# Altium PCB RCCLTV2.PcbDoc
Units mil, origin at the board's own origin, x right, y up, seen from the top; angles counter-clockwise.
Board outline 1102.36 x 1771.65 mil, 4 copper layers (Top Layer, Layer 1, Layer 2, Bottom Layer), stack 23.756 mil thick; 57 components, 45 nets, 244 pads, 4 vias.
Unrouted connection lines stored in the file: 74.
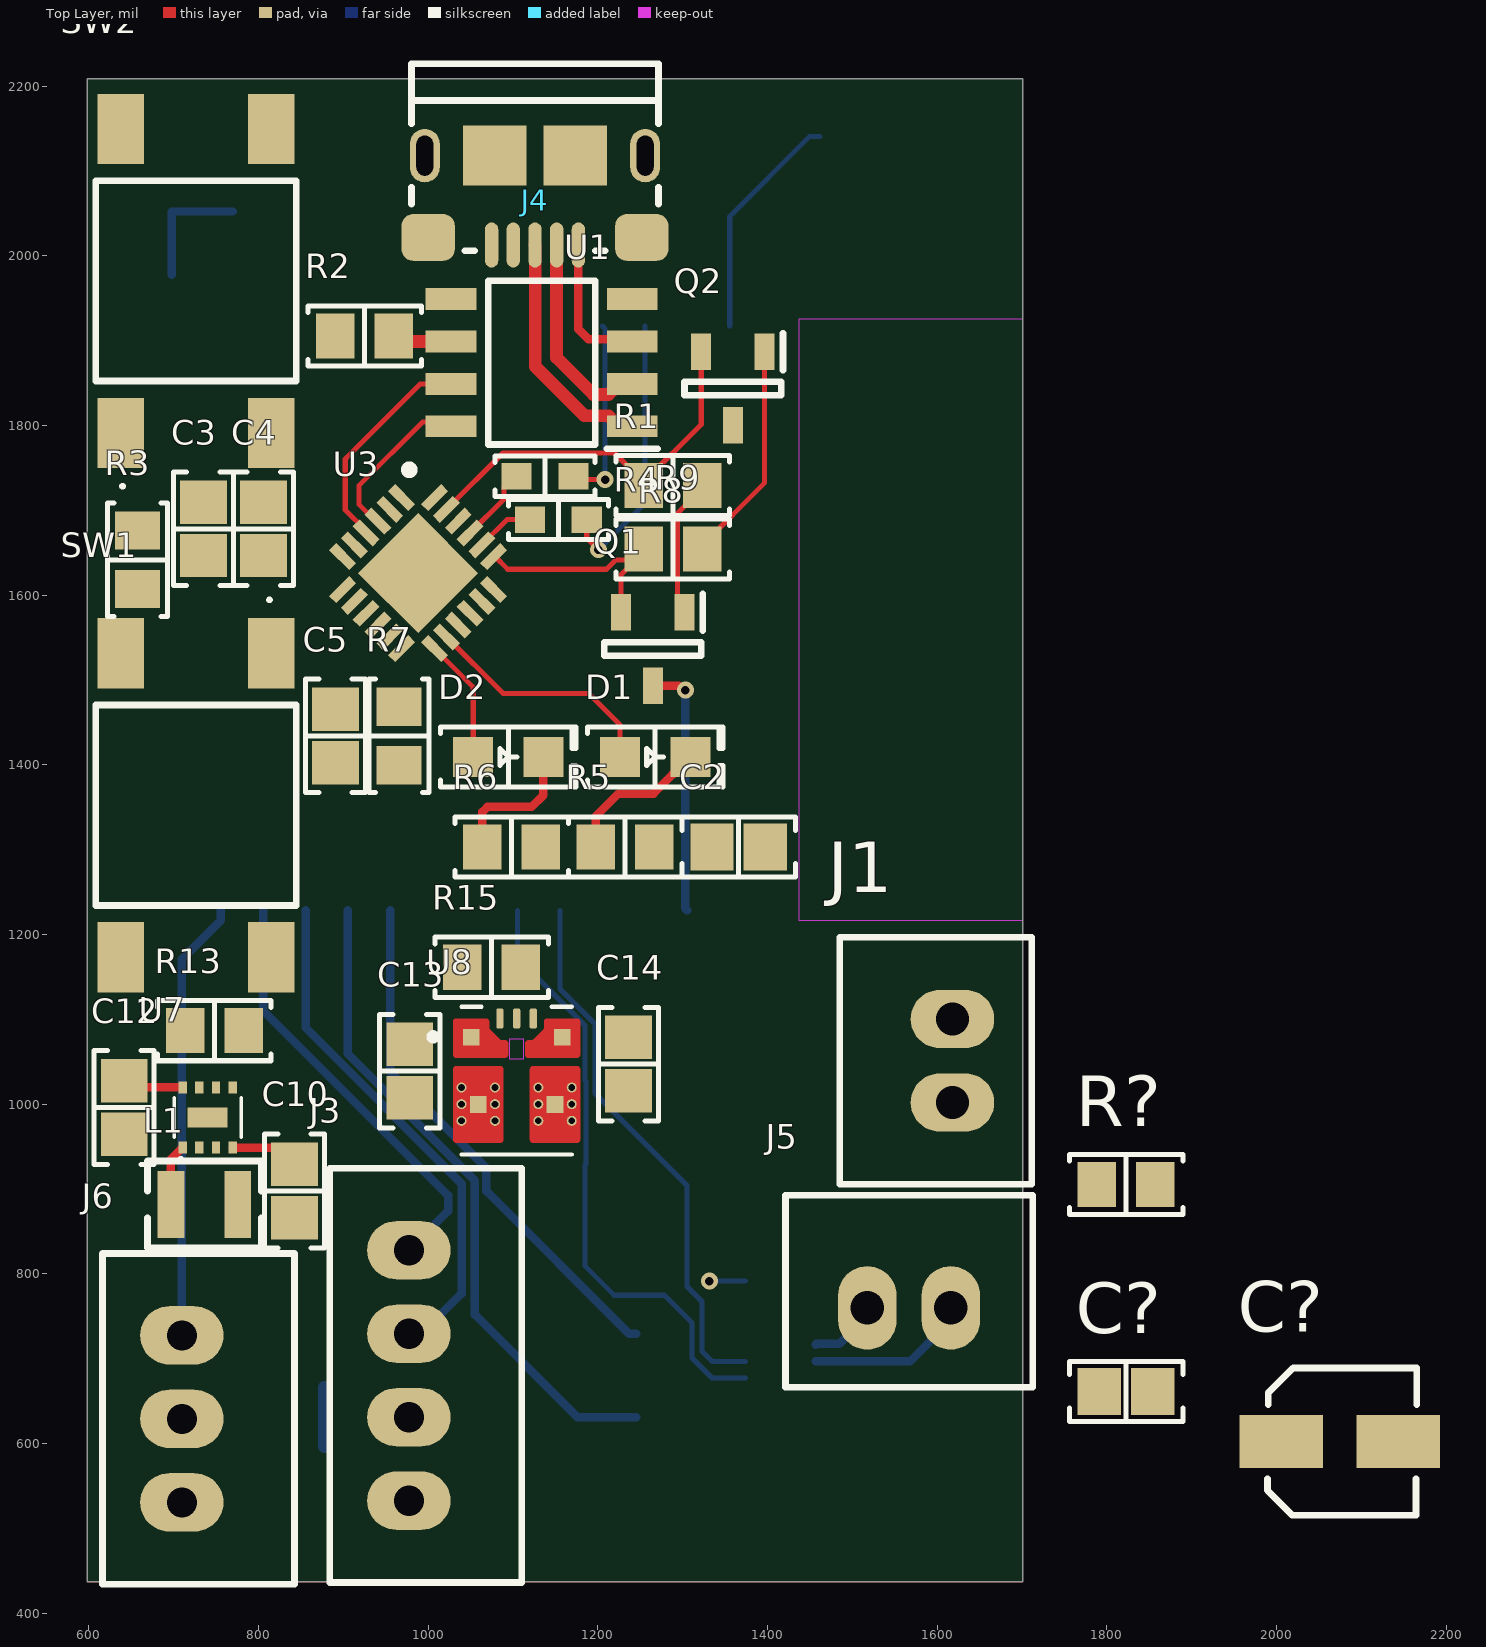
[diagram p0: Top Layer view]
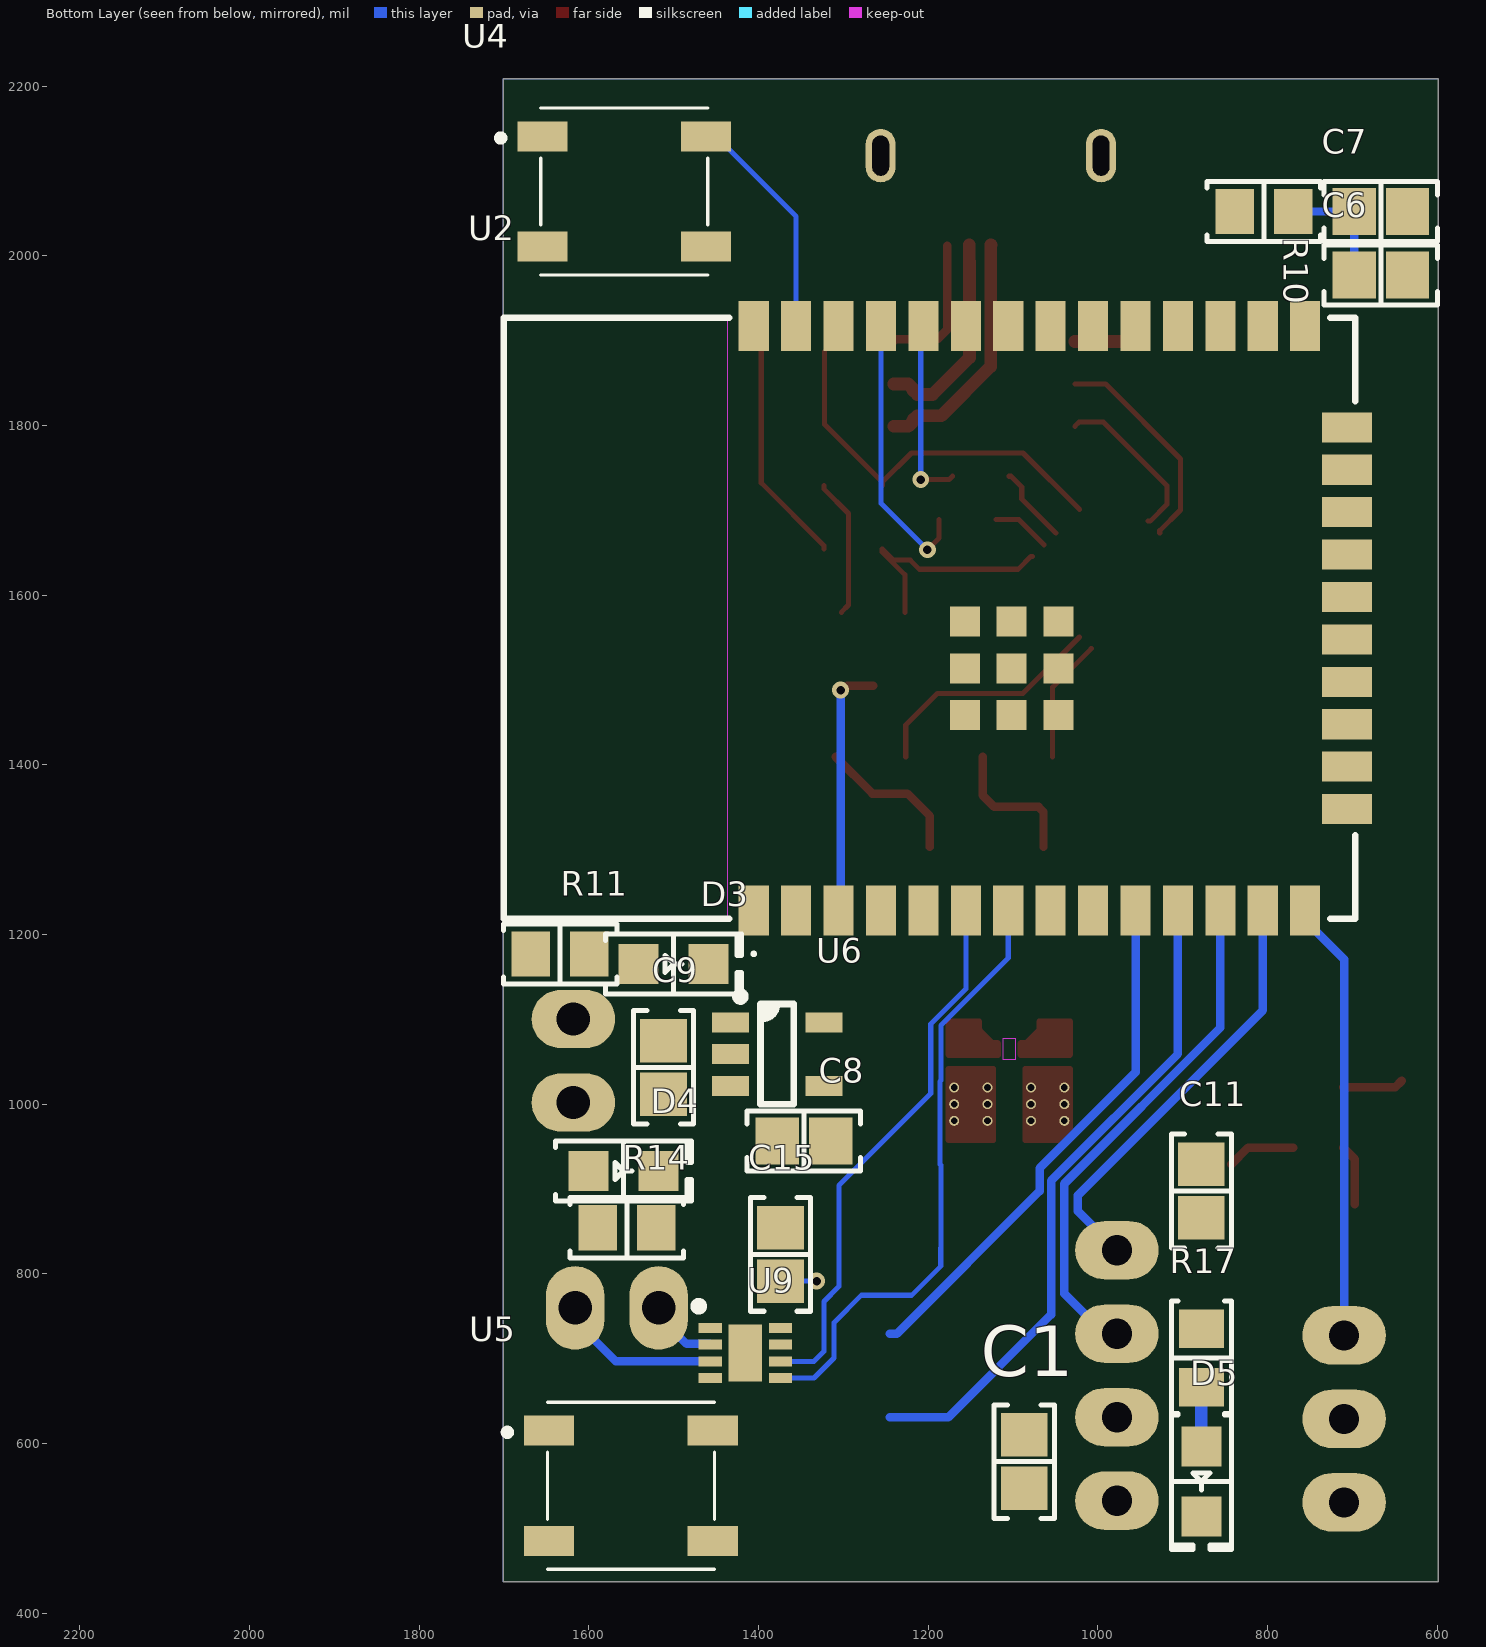
[diagram p1: Bottom Layer view, seen from below]
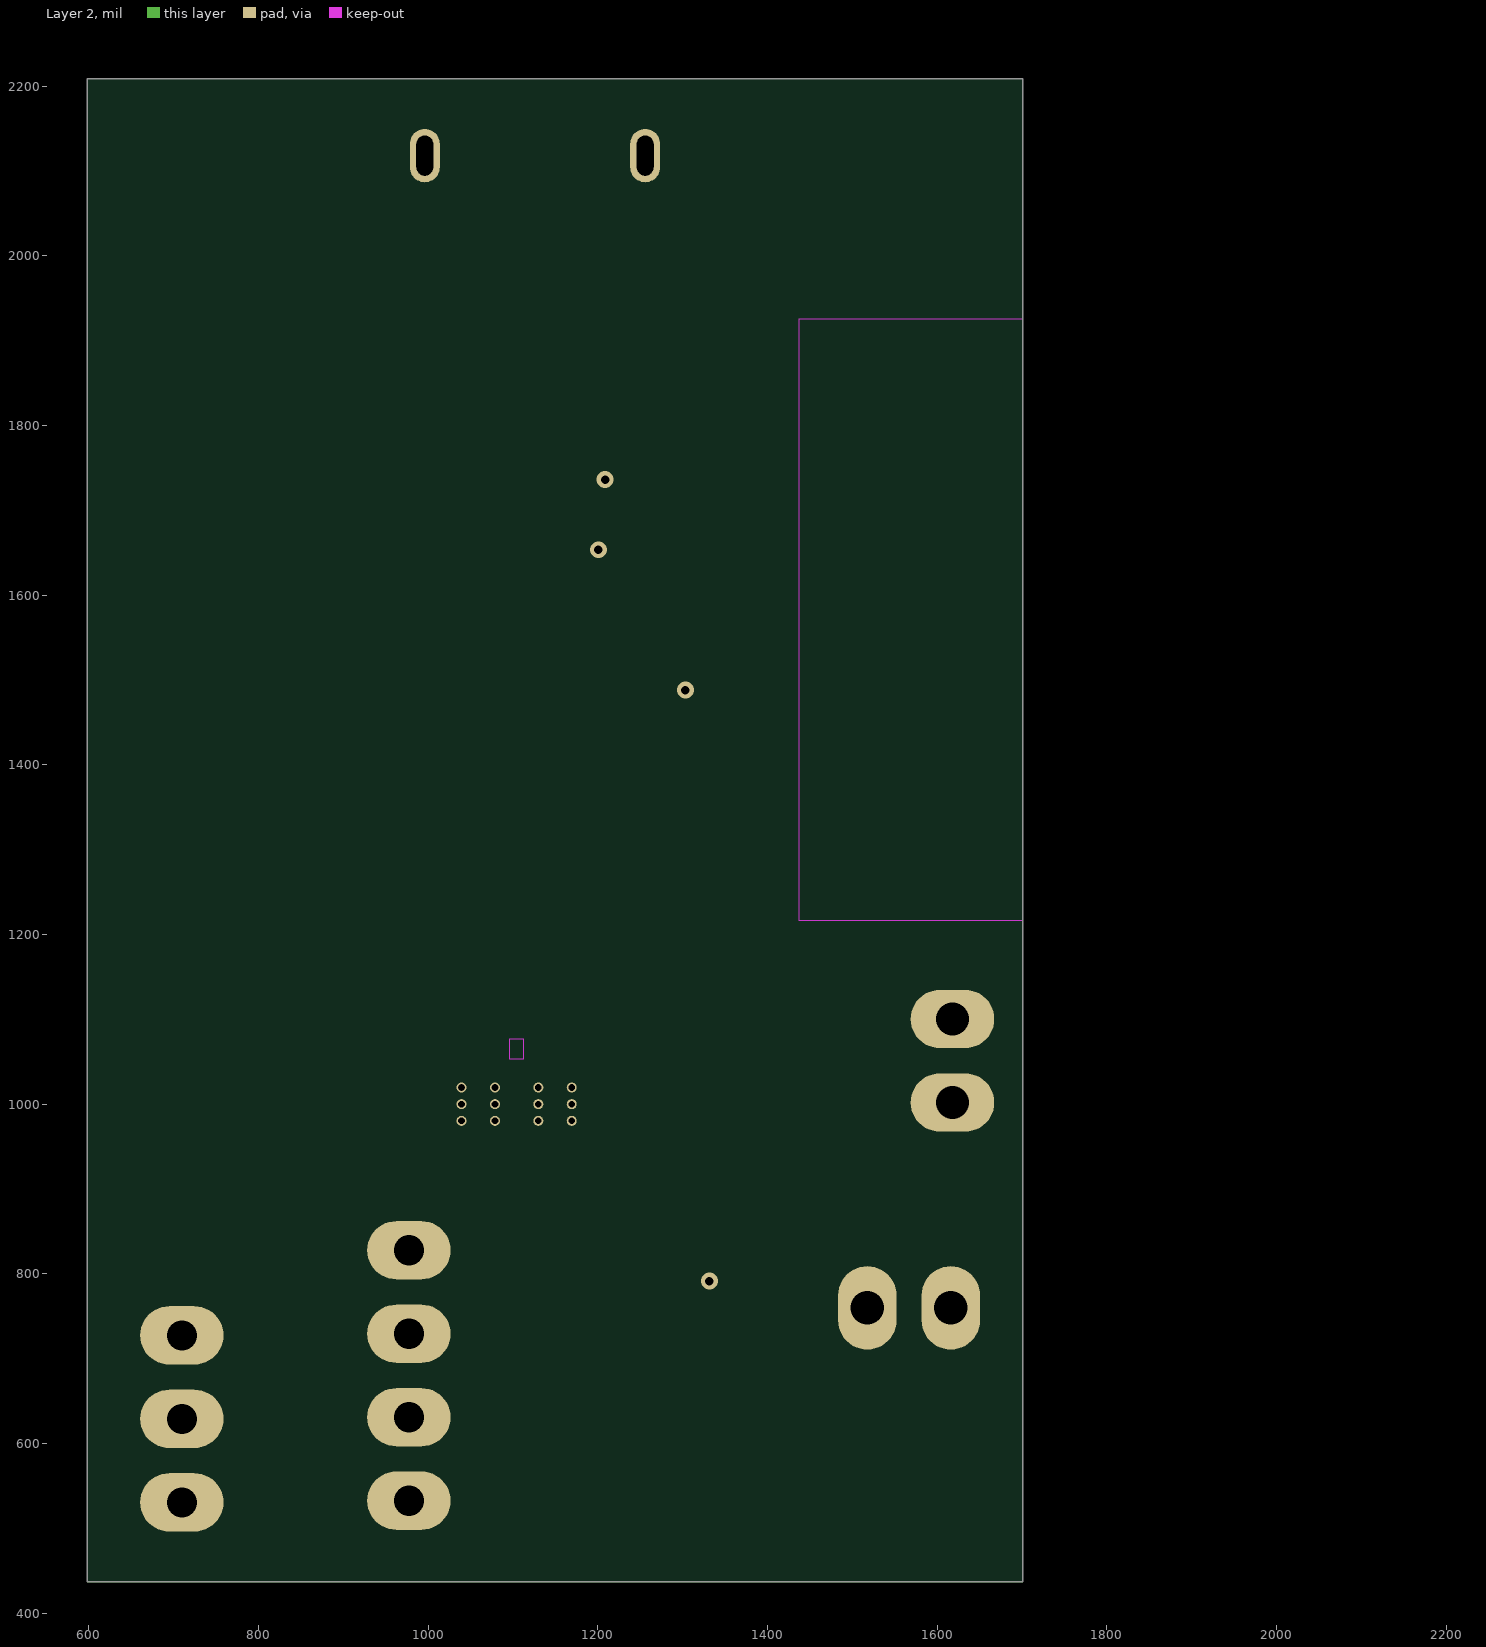
[diagram p2: Layer 2]

## Layer stack, top to bottom
Top Solder: solder mask 0.4, Solder Resist, Dk 3.5
Top Layer: signal copper 1.4
Dielectric 2: prepreg 2.8, PP-006, Dk 4.1
Layer 1: signal copper 1.378
Dielectric 1: dielectric 12.6, FR-4, Dk 4.8
Layer 2: signal copper 1.378
Dielectric 3: prepreg 2.8, PP-006, Dk 4.1
Bottom Layer: signal copper 1.4
Bottom Solder: solder mask 0.4, Solder Resist, Dk 3.5

## Board outline
598.43,437.01 598.43,2208.66 1700.79,2208.66 1700.79,437.01

## Design rules (kind name [scope] priority, off if disabled: settings)
BoardOutlineClearance [All] p1: gap=11.81 ignorepadtopadclearanceinfootprint=FALSE except(15.75: Arc-SplitBarrior Arc-SplitContinuation Track-SplitBarrior Track-SplitContinuation SMDPad-SplitBarrior SMDPad-SplitContinuation THPad-SplitBarrior THPad-SplitContinuation Via-SplitBarrior Via-SplitContinuation Fill-SplitBarrior Fill-SplitContinuation Poly-SplitBarrior Poly-SplitContinuation Region-SplitBarrior Region-SplitContinuation Text-SplitBarrior Text-SplitContinuation)
Clearance "Clearance Different Nets" [All] p1: gap=7.87 ignorepadtopadclearanceinfootprint=FALSE except(3.5: Arc-Arc Arc-Track Arc-SMDPad Track-Track Track-SMDPad; 5: SMDPad-SMDPad SMDPad-Via THPad-Via Via-Via; 10: Arc-Via Arc-Text Track-Via Track-Text SMDPad-Text THPad-Text Via-Text Fill-Text Poly-Text Region-Text Text-Text; 19.68: THPad-THPad Via-Hole)
Clearance "Clearance Same Nets" [All] p2: gap=7.87 ignorepadtopadclearanceinfootprint=FALSE except(3.5: Arc-Arc Arc-Track Arc-SMDPad Track-Track Track-SMDPad SMDPad-SMDPad; 5: SMDPad-Via THPad-Via; 10: Arc-Via Arc-Text Track-Via Track-Text SMDPad-Text THPad-Text Via-Via Via-Text Fill-Text Poly-Text Region-Text Text-Text)
Clearance "Clearance Bottom Layer" [OnLayer('Bottom Layer')] p3: gap=8 ignorepadtopadclearanceinfootprint=TRUE except(10: Arc-Text Track-Text SMDPad-Text THPad-Text Via-Text Fill-Text Poly-Text Region-Text Text-Text)
Clearance "Clearance Top Layer" [OnLayer('Top Layer')] p4: gap=8 ignorepadtopadclearanceinfootprint=TRUE except(10: Arc-Text Track-Text SMDPad-Text THPad-Text Via-Text Fill-Text Poly-Text Region-Text Text-Text)
DiffPairsRouting [All] p1: maxlimit=10 minlimit=6 mostfreqgap=10 toplayer_minwidth=6 toplayer_maxwidth=15 toplayer_prefwidth=10 midlayer1_minwidth=6 midlayer1_maxwidth=15 midlayer1_prefwidth=10 midlayer2_minwidth=6 midlayer2_maxwidth=15 midlayer2_prefwidth=10 bottomlayer_minwidth=6 bottomlayer_maxwidth=15 bottomlayer_prefwidth=10 maxuncoupledlength=500
HoleSize [All] p1: absolutevalues=TRUE maxlimit=248.03 minlimit=7.87 maxpercent=80.000 minpercent=20.000
MinimumAnnularRing [IsVia] p1: minimumring=4
MinimumSolderMaskSliver [All] p1: minsoldermaskwidth=3.94
PolygonConnect PolygonConnect_1 [All] p1: thpad.connectstyle=Relief thpad.reliefconductorwidth=20 thpad.reliefentries=4 thpad.polygonreliefangle="90 Angle" thpad.airgapwidth=10 smdpad.connectstyle=Relief smdpad.reliefconductorwidth=20 smdpad.reliefentries=4 smdpad.polygonreliefangle="90 Angle" smdpad.airgapwidth=10 via.connectstyle=Direct via.reliefconductorwidth=20 via.reliefentries=4 via.polygonreliefangle="90 Angle" via.airgapwidth=10
RoutingCorners [All] p1: cornerstyle=Round minsetback=100 maxsetback=100
RoutingVias [All] p1: holewidth=19.68 width=39.37 viastyle="Through Hole" minholewidth=7.87 minwidth=13.78 maxholewidth=39.37 maxwidth=78.74
SilkToSilkClearance [All] p1: silktosilkclearance=3.94
SilkToSolderMaskClearance [IsPad] p1: minsilkscreentomaskgap=3.94 clearancetoexposedcopper=TRUE
SolderMaskExpansion [All] p1: expansion=4 istentingtop=FALSE
Width [All] p1: maxlimit=100 minlimit=3.5 preferedwidth=15
24 further rules are at their usual default settings.

## Classes and differential pairs
component class Top_Level: C1 J1 J3 J4 J5 J6
component class Power_Supply: C8 C9 C10 C11 C12 C13 C14 D3 D4 D5 L1 R11 R13 R14 R15 R17 R? U6 U7 U8
component class Motor_Driver: C15 C? U9
component class MCU: C2 C3 C4 C5 C6 C7 D1 D2 Q1 Q2 R1 R2 R3 R4 R5 R6 R7 R8 R9 R10 SW1 SW2 U1 U2 U3 U4 U5
differential pair USB: +USB_P -USB_N
differential pair USB-PROT: +USB-PROT_P -USB-PROT_N

## Components (designator, comment, footprint, x,y, rotation, side; value= is the part's Value field where it differs from the comment)
C1 "0.1 µF" "CAP 0805_2012" 1086.61,578.74 r270 bottom
C2 "0.1 µF" "CAP 0805_2012" 1366.14,1303.15 r180 top
C3 "0.1 µF" "CAP 0805_2012" 735.16,1678.23 r90 top
C4 "0.1 µF" "CAP 0805_2012" 806.02,1678.23 r90 top
C5 "0.1 µF" "CAP 0805_2012" 890.83,1434.13 r90 top
C6 "0.1 µF" "CAP 0805_2012" 666.42,1977.44 r0 bottom
C7 "0.1 µF" "CAP 0805_2012" 666.42,2052.24 r180 bottom
C8 "4.7µF" "CAP 0805_2012" 1346.46,956.69 r0 bottom
C9 "4.7µF" "CAP 0805_2012" 1511.81,1043.31 r90 bottom
C10 "0.1 µF" "CAP 0805_2012" 842.52,897.64 r270 top
C11 "4.7µF" "CAP 0805_2012" 877.95,897.64 r270 bottom
C12 "22 µF" "CAP 0805_2012" 641.73,996.06 r90 top
C13 "0.1 µF" "CAP 0805_2012" 978.35,1038.98 r90 top
C14 "0.1 µF" "CAP 0805_2012" 1236.22,1047.24 r270 top
C15 "0.1 µF" "CAP 0805_2012" 1374.02,822.83 r90 bottom
C? "0.1 µF" "CAP 0805_2012" 1822.83,661.42 r0 top
C? "47 µF" "CAP ALSMD 4.3MM H5.4MM" 2074.8,602.36 r0 top
D1 "Blue" "LED 0805_2012 BLUE" 1267.72,1409.45 r0 top
D2 "Blue" "LED 0805_2012 BLUE" 1094.49,1409.45 r0 top
D3 "Blue" "LED 0805_2012 BLUE" 1500,1165.35 r180 bottom
D4 "Blue" "LED 0805_2012 BLUE" 1559.06,921.26 r180 bottom
D5 "Blue" "LED 0805_2012 BLUE" 877.95,555.12 r270 bottom
J1 "B2B-XH-A(LF)(SN)" "JST XH B2B-XH-A" 1618.11,1051.18 r270 top
J3 "B4B-XH-A(LF)(SN)" "JST XH B4B-XH-A" 977.44,680.2 r90 top
J4 "10118193-0001LF" "FCI USB 10118193-0001LF" 1125.98,2116.14 r0 top
J5 "B2B-XH-A(LF)(SN)" "JST XH B2B-XH-A" 1566.93,759.84 r180 top locked
J6 "B3B-XH-A(LF)(SN)" "JST XH B3B-XH-A" 709.72,629.02 r90 top
L1 "1 µH" "TAIYO YUDEN MAMK2520T1R0M" 736.22,881.89 r180 top
Q1 "SS8050-G" SOT95P240X115-3N 1264.84,1536.5 r270 top
Q2 "SS8050-G" SOT95P240X115-3N 1359.33,1843.58 r270 top
R1 "10 kOhms" "RES 0805_2012" 1288.46,1729.41 r0 top
R2 "22.1 kOhms" "RES 0805_2012" 925.2,1905.51 r180 top
R3 "47.5 kOhms" "RES 0805_2012" 657.48,1641.73 r270 top
R4 "10 kOhms" "RES 0805_2012" 1288.46,1654.61 r0 top
R5 "270 Ohms" "RES 0805_2012" 1232.28,1303.15 r0 top
R6 "270 Ohms" "RES 0805_2012" 1098.43,1303.15 r0 top
R7 "10 kOhms" "RES 0805_2012" 965.63,1434.13 r90 top
R8 "0 Ohms" "YAGEO RES 0603_1608" 1137.8,1740.16 r0 top
R9 "0 Ohms" "YAGEO RES 0603_1608" 1153.54,1688.98 r0 top
R10 "10 kOhms" "RES 0805_2012" 804.21,2052.24 r0 bottom
R11 "270 Ohms" "RES 0805_2012" 1633.86,1177.17 r180 bottom
R13 "1 MOhms" "RES 0805_2012" 748.03,1086.61 r0 top
R14 "270 Ohms" "RES 0805_2012" 1555.12,854.33 r0 bottom
R15 "10 kOhms" "RES 0805_2012" 1074.8,1161.42 r180 top
R17 "270 Ohms" "RES 0805_2012" 877.95,700.79 r270 bottom
R? "4.22 kOhms" "RES 0805_2012" 1822.83,905.51 r0 top
SW1 "TS04-66-43-BK-160-SMT" TS046643BK160SMT 726.38,1352.36 r270 top
SW2 "TS04-66-43-BK-160-SMT" TS046643BK160SMT 726.38,1970.47 r90 top
U1 "USB6B1RL" SOIC127P600X175-8N 1133.86,1874.02 r180 top
U2 "ESP32-WROOM-32E-N8" ESP32WROOM32EN8 1198.43,1572.83 r90 bottom locked
U3 "CP2102N-A02-GQFN24R" QFN50P400X400X80-25N-D 988.19,1625.98 r315 top
U4 "COM-13667" COM13667 1583.74,2075.87 r180 bottom
U5 "COM-13667" COM13667 1575.87,550.28 r180 bottom
U6 "MCP73831T-2ATI/OT" "MICROCHIP SOT-23-5 OT" 1377.95,1059.06 r180 bottom
U7 "MIC2876-5.0YMT-TR" MIC287650YMTTR 740.16,984.25 r0 top
U8 "TPSM861253RDXR" VREG_TPSM861253RDXR 1104.33,1026.18 r0 top
U9 "DRV8210PDSGR" SON50P200X200X80-9N 1415.35,706.69 r180 bottom

## Footprints (in the part's own frame and the unit in brackets; to place one, negate y for a bottom-side part, rotate by r counter-clockwise, add the part's x,y. Pads: shape width x height; smd on the part's side, far side on the other; paste and mask are expansions set on the pad)
"CAP 0805_2012" [mm] "Chip Capacitor, 2-Leads, Body 2.00x1.20mm, IPC Medium Density"
  rect 1.3x1.4 smd: 1(-0.8,0) 2(0.8,0)
  silkscreen extent -1.7,-0.9 1.7,0.9, body extent -1,-0.64 1,0.64, height 1.26
"CAP ALSMD 4.3MM H5.4MM" [mm] "Aluminum Electrolytic Capacitor, Body 4.30x4.30x5.40mm, IPC Low Density"
  rect 2.5x1.6 smd: 1(-1.75,0) 2(1.75,0)
  silkscreen extent -2.17,-2.21 2.3,2.2, body extent -2.3,-2.2 2.3,2.2, height 5.4
COM13667 [mm]
  rect 1.5x0.9 smd: 1(-1.8,1.65) 2(-1.8,-1.65) 3(3.1,-1.65) 4(3.1,1.65)
  silkscreen extent -3.15,-2.5 3.15,2.5, body extent -2.6,-2.5 3.8,2.5, height 2.65
ESP32WROOM32EN8 [mm]
  rect 1.5x0.9 smd: 1(-8.75,5.26) 2(-8.75,3.99) 3(-8.75,2.72) 4(-8.75,1.45) 5(-8.75,0.18) 6(-8.75,-1.09) 7(-8.75,-2.36) 8(-8.75,-3.63) 9(-8.75,-4.9) 10(-8.75,-6.17) 11(-8.75,-7.44) 12(-8.75,-8.71) 13(-8.75,-9.98) 14(-8.75,-11.25) 25(8.75,-11.25) 26(8.75,-9.98) 27(8.75,-8.71) 28(8.75,-7.44) 29(8.75,-6.17) 30(8.75,-4.9) 31(8.75,-3.63) 32(8.75,-2.36) 33(8.75,-1.09) 34(8.75,0.18) 35(8.75,1.45) 36(8.75,2.72) 37(8.75,3.99) 38(8.75,5.26)
  rect 0.9x1.5 smd: 15(-5.715,-12.5) 16(-4.445,-12.5) 17(-3.175,-12.5) 18(-1.905,-12.5) 19(-0.635,-12.5) 20(0.635,-12.5) 21(1.905,-12.5) 22(3.175,-12.5) 23(4.445,-12.5) 24(5.715,-12.5)
  rect 0.9x0.9 smd: 39(-2.9,-1.06) 40(-2.9,-2.46) 41(-2.9,-3.86) 42(-1.5,-3.86) 43(-0.1,-3.86) 44(-0.1,-2.46) 45(-0.1,-1.06) 46(-1.5,-1.06) 47(-1.5,-2.46)
  silkscreen extent -10.1,-12.75 9,12.75, body extent -9,-12.75 9,12.75, height 3.13
"FCI USB 10118193-0001LF" [mm] "USB 2.0 Type B Micro"
  oval 0.4x1.35 smd: 1(1.3,-2.625) 2(0.65,-2.625) 3(0,-2.625) 4(-0.65,-2.625) 5(-1.3,-2.625)
  oval 0.9x1.6 hole 0.5 slot 1.2 at 90 deg: S(-3.3,0.05) S(3.3,0.05)
  rrect50% 1.6x1.4 smd: S(-3.2,-2.4) S(3.2,-2.4)
  rect 1.9x1.8 smd: S(-1.2,0.05) S(1.2,0.05)
  silkscreen extent -3.7,-2.8 3.7,2.8, body extent -3.93,-2.9 3.93,2.76, height 2.78
"JST XH B2B-XH-A" [mm]
  oval 1.75x2.5 hole 1: 1(-1.25,0) 2(1.25,0)
  silkscreen extent -3.7,-3.38 3.7,2.38, body extent -3.7,-3.38 3.7,2.38, height 7
"JST XH B3B-XH-A" [mm]
  oval 1.75x2.5 hole 0.9: 1(-2.5,0) 2(0,0) 3(2.5,0)
  silkscreen extent -4.95,-3.38 4.95,2.38, body extent -4.95,-3.37 4.95,2.38, height 7
"JST XH B4B-XH-A" [mm]
  oval 1.75x2.5 hole 0.9: 1(-3.75,0) 2(-1.25,0) 3(1.25,0) 4(3.75,0)
  silkscreen extent -6.2,-3.38 6.2,2.38, body extent -6.2,-3.37 6.2,2.38, height 7
"LED 0805_2012 BLUE" [mm] "Chip Diode, 2-Leads, Body 2.00x1.25mm, IPC Medium Density"
  rect 1.2x1.2 smd: 1(-1.05,0) 2(1.05,0)
  silkscreen extent -2.03,-0.9 2.03,0.9, body extent -1,-0.62 1,0.63, height 0.9
MIC287650YMTTR [mm]
  rect 0.25x0.35 smd: 1(-0.75,-0.9) 2(-0.25,-0.9) 3(0.25,-0.9) 4(0.75,-0.9) 5(0.75,0.9) 6(0.25,0.9) 7(-0.25,0.9) 8(-0.75,0.9)
  rect 1.2x0.6 smd: 9(0,0)
  silkscreen extent -1,-1.3 1,0.6, body extent -1,-1 1,1, height 0.57
"MICROCHIP SOT-23-5 OT" [mm] "SOT23, 5-Leads, Body 2.90x2.70mm, Pitch 0.95mm, IPC Medium Density"
  rect 1.1x0.6 smd: 1(-1.4,0.95) 2(-1.4,0) 3(-1.4,-0.95) 4(1.4,-0.95) 5(1.4,0.95)
  silkscreen extent -1.23,-1.5 0.5,1.85, body extent -1.36,-1.45 1.36,1.45, height 1.19
QFN50P400X400X80-25N-D [mm]
  rect 0.85x0.3 smd: 1(-1.95,1.25) 2(-1.95,0.75) 3(-1.95,0.25) 4(-1.95,-0.25) 5(-1.95,-0.75) 6(-1.95,-1.25) 13(1.95,-1.25) 14(1.95,-0.75) 15(1.95,-0.25) 16(1.95,0.25) 17(1.95,0.75) 18(1.95,1.25)
  rect 0.3x0.85 smd: 7(-1.25,-1.95) 8(-0.75,-1.95) 9(-0.25,-1.95) 10(0.25,-1.95) 11(0.75,-1.95) 12(1.25,-1.95) 19(1.25,1.95) 20(0.75,1.95) 21(0.25,1.95) 22(-0.25,1.95) 23(-0.75,1.95) 24(-1.25,1.95)
  rect 2.55x2.55 smd: 25(0,0)
  silkscreen extent -2.5,1.88 -2.25,2.12, body extent -2.05,-2.05 2.05,2.05, height 0.8
"RES 0805_2012" [mm] "Chip Resistor, 2-Leads, Body 2.00x1.25mm, IPC Medium Density"
  rect 1.15x1.35 smd: 1(-0.875,0) 2(0.875,0)
  silkscreen extent -1.7,-0.9 1.7,0.9, body extent -1,-0.62 1,0.63, height 0.6
SOIC127P600X175-8N [mm]
  rect 1.525x0.65 smd: 1(-2.712,1.905) 2(-2.712,0.635) 3(-2.712,-0.635) 4(-2.712,-1.905) 5(2.712,-1.905) 6(2.712,-0.635) 7(2.712,0.635) 8(2.712,1.905)
  silkscreen extent -3.47,-2.45 1.6,2.58, body extent -3,-2.45 3,2.45, height 1.75
SON50P200X200X80-9N [mm]
  rect 0.7x0.3 smd: 1(-1.05,0.75) 2(-1.05,0.25) 3(-1.05,-0.25) 4(-1.05,-0.75) 5(1.05,-0.75) 6(1.05,-0.25) 7(1.05,0.25) 8(1.05,0.75)
  rect 1x1.7 smd: 9(0,0)
  silkscreen extent -1.53,1.28 -1.28,1.52, body extent -1,-1 1,1, height 0.77
SOT95P240X115-3N [mm]
  rect 1.1x0.6 smd: 1(-1.1,0.95) 2(-1.1,-0.95) 3(1.1,0)
  silkscreen extent -1.65,-1.45 0.2,1.5, body extent -1.2,-1.45 1.2,1.45, height 1.15
"TAIYO YUDEN MAMK2520T1R0M" [mm] "Inductor, 2-Leads, Body 2.50x2.00mm, IPC Medium Density"
  rect 0.8x2 smd: 1(-1,0) 2(1,0)
  silkscreen extent -1.7,-1.3 1.7,1.3, body extent -1.3,-1.02 1.3,1.03, height 1.2
TS046643BK160SMT [mm]
  rect 2.1x1.4 smd: 1(-4.55,2.25) 2(4.55,2.25) 3(-4.55,-2.25) 4(4.55,-2.25)
  silkscreen extent -6.2,-3 3,3, body extent -5,-3 5,3, height 4.3
VREG_TPSM861253RDXR [mm]
  rect 0.5x0.5 smd paste-1 mask+0: 1(-1.362,1.338) 2(-1.15,-0.675) 3(1.15,-0.675) 4(1.362,1.338)
  rrect50% 0.22x0.6 smd mask+0: 5(0.5,1.9) 6(0,1.9) 7(-0.5,1.9)
  round 0.3 hole 0.2 mask+0: 8(-1.65,-0.165) 9(-1.65,-0.665) 10(-1.65,-1.165) 11(-0.65,-0.165) 12(-0.65,-0.665) 13(-0.65,-1.165) 14(0.65,-0.165) 15(0.65,-0.665) 16(0.65,-1.165) 17(1.65,-0.165) 18(1.65,-0.665) 19(1.65,-1.165)
  Top Layer region: 205 vertices and 0 holes, not listed, extent 0.255,0.725 1.9,1.9
  Top Layer region: 205 vertices and 0 holes, not listed, extent -1.9,0.725 -0.255,1.9
  Top Layer region: 1.81,0.474 1.816,0.474 1.821,0.473 1.826,0.472 1.831,0.47 1.836,0.468 1.841,0.466 1.845,0.464 1.85,0.462 1.854,0.459 1.859,0.456 1.863,0.453 1.867,0.449 1.871,0.446 1.874,0.442 1.878,0.438 1.881,0.434 1.884,0.429 1.887,0.425 1.889,0.42 1.891,0.416 1.893,0.411 1.895,0.406 1.897,0.401 1.898,0.396 1.899,0.391 1.899,0.385 1.9,0.38 1.9,0.375 1.9,-1.725 1.9,-1.73 1.899,-1.735 1.899,-1.741 1.898,-1.746 1.897,-1.751 1.895,-1.756 1.893,-1.761 1.891,-1.766 1.889,-1.77 1.887,-1.775 1.884,-1.779 1.881,-1.784 1.878,-1.788 1.874,-1.792 1.871,-1.796 1.867,-1.799 1.863,-1.803 1.859,-1.806 1.854,-1.809 1.85,-1.812 1.845,-1.814 1.841,-1.816 1.836,-1.818 1.831,-1.82 1.826,-1.822 1.821,-1.823 1.816,-1.824 1.81,-1.824 1.805,-1.825 0.495,-1.825 0.49,-1.824 0.484,-1.824 0.479,-1.823 0.474,-1.822 0.469,-1.82 0.464,-1.818 0.459,-1.816 0.455,-1.814 0.45,-1.812 0.446,-1.809 0.441,-1.806 0.437,-1.803 0.433,-1.799 0.429,-1.796 0.426,-1.792 0.422,-1.788 0.419,-1.784 0.416,-1.779 0.413,-1.775 0.411,-1.77 0.409,-1.766 0.407,-1.761 0.405,-1.756 0.403,-1.751 0.402,-1.746 0.401,-1.741 0.401,-1.735 0.4,-1.73 0.4,-1.725 0.4,0.375 0.4,0.38 0.401,0.385 0.401,0.391 0.402,0.396 0.403,0.401 0.405,0.406 0.407,0.411 0.409,0.416 0.411,0.42 0.413,0.425 0.416,0.429 0.419,0.434 0.422,0.438 0.426,0.442 0.429,0.446 0.433,0.449 0.437,0.453 0.441,0.456 0.446,0.459 0.45,0.462 0.455,0.464 0.459,0.466 0.464,0.468 0.469,0.47 0.474,0.472 0.479,0.473 0.484,0.474 0.49,0.474 0.495,0.475 1.805,0.475
  Top Layer region: -0.49,0.474 -0.484,0.474 -0.479,0.473 -0.474,0.472 -0.469,0.47 -0.464,0.468 -0.459,0.466 -0.455,0.464 -0.45,0.462 -0.446,0.459 -0.441,0.456 -0.437,0.453 -0.433,0.449 -0.429,0.446 -0.426,0.442 -0.422,0.438 -0.419,0.434 -0.416,0.429 -0.413,0.425 -0.411,0.42 -0.409,0.416 -0.407,0.411 -0.405,0.406 -0.403,0.401 -0.402,0.396 -0.401,0.391 -0.401,0.385 -0.4,0.38 -0.4,0.375 -0.4,-1.725 -0.4,-1.73 -0.401,-1.735 -0.401,-1.741 -0.402,-1.746 -0.403,-1.751 -0.405,-1.756 -0.407,-1.761 -0.409,-1.766 -0.411,-1.77 -0.413,-1.775 -0.416,-1.779 -0.419,-1.784 -0.422,-1.788 -0.426,-1.792 -0.429,-1.796 -0.433,-1.799 -0.437,-1.803 -0.441,-1.806 -0.446,-1.809 -0.45,-1.812 -0.455,-1.814 -0.459,-1.816 -0.464,-1.818 -0.469,-1.82 -0.474,-1.822 -0.479,-1.823 -0.484,-1.824 -0.49,-1.824 -0.495,-1.825 -1.805,-1.825 -1.81,-1.824 -1.816,-1.824 -1.821,-1.823 -1.826,-1.822 -1.831,-1.82 -1.836,-1.818 -1.841,-1.816 -1.845,-1.814 -1.85,-1.812 -1.854,-1.809 -1.859,-1.806 -1.863,-1.803 -1.867,-1.799 -1.871,-1.796 -1.874,-1.792 -1.878,-1.788 -1.881,-1.784 -1.884,-1.779 -1.887,-1.775 -1.889,-1.77 -1.891,-1.766 -1.893,-1.761 -1.895,-1.756 -1.897,-1.751 -1.898,-1.746 -1.899,-1.741 -1.899,-1.735 -1.9,-1.73 -1.9,-1.725 -1.9,0.375 -1.9,0.38 -1.899,0.385 -1.899,0.391 -1.898,0.396 -1.897,0.401 -1.895,0.406 -1.893,0.411 -1.891,0.416 -1.889,0.42 -1.887,0.425 -1.884,0.429 -1.881,0.434 -1.878,0.438 -1.874,0.442 -1.871,0.446 -1.867,0.449 -1.863,0.453 -1.859,0.456 -1.854,0.459 -1.85,0.462 -1.845,0.464 -1.841,0.466 -1.836,0.468 -1.831,0.47 -1.826,0.472 -1.821,0.473 -1.816,0.474 -1.81,0.474 -1.805,0.475 -0.495,0.475
  Keep-Out Layer region: 0.2,0.675 -0.2,0.675 -0.2,1.295 0.2,1.295
  silkscreen extent -2.6,-2.17 1.65,2.25, body extent -1.65,-2 1.65,2, height 2.1
"YAGEO RES 0603_1608" [mm] "Chip Resistor, 2-Leads, Body 1.60x0.80mm"
  rect 0.9x0.8 smd: 1(-0.85,0) 2(0.85,0)
  silkscreen extent -1.5,-0.6 1.5,0.6, body extent -0.8,-0.4 0.8,0.4, height 0.45

## Part data
C1 C2 C3 C4 C5 C6 C7 C10 C13 C14 C15 C?: library part 0805B104K250CT, "CAP CER 0.1UF 25V X7R 0805", Device Package="0805 (2012 Metric)", manufacturer="Walsin Technology Corporation", Operating Temperature="-55°C ~ 125°C", Supplier Part Number 1=1292-1566-1-ND, Temperature Coefficient=X7R, Tolerance=±10%, Voltage - Rated=25V, Applications="General Purpose", Capacitance="0.1 µF", componentlink1description=Datasheet, componentlink1url=http://www.passivecomponent.com/wp-content/uploads/2018/10/MLCC.pdf, componentlink2description="DigiKey Link", componentlink2url=https://www.digikey.com/en/products/detail/walsin-technology-corporation/0805B104K250CT/9355063, lastupdated="2/9/2024 8:16:02 PM", Lifecycle Status=Active, Minimum Order=1, Mounting Type="Surface Mount, MLCC", Package / Case="0805 (2012 Metric)", packaging=TapeAndReel, Part Number=0805B104K250CT, Part Status=Active, partid=4879, price=0.01, series=-, Size / Dimension="0.079\" L x 0.049\" W (2.00mm x 1.25mm)", Supplier 1=DigiKey, Thickness (Max)="0.035\" (0.90mm)"
C8 C9 C11: library part 0805YC475KAT2A, "CAP CER 4.7UF 16V X7R 0805", Device Package="0805 (2012 Metric)", manufacturer="AVX Corporation", Operating Temperature="-55°C ~ 125°C", Supplier Part Number 1=478-5722-1-ND, Temperature Coefficient=X7R, Tolerance=±10%, Voltage - Rated=16V, Applications="General Purpose", Capacitance=4.7µF, componentlink1description=Datasheet, componentlink1url=http://datasheets.avx.com/X7RDielectric.pdf, componentlink2description="DigiKey Link", componentlink2url=http://digikey.com/product-detail/en/avx-corporation/0805YC475KAT2A/478-5722-1-ND/2136330, lastupdated="9/2/2020 1:04:38 AM", Lifecycle Status=Active, Minimum Order=1, Mounting Type="Surface Mount, MLCC", Package / Case="0805 (2012 Metric)", packaging=TapeAndReel, Part Number=0805YC475KAT2A, Part Status=Active, partid=4831, price=0.11, series=-, Size / Dimension="0.079\" L x 0.049\" W (2.01mm x 1.25mm)", Supplier 1=DigiKey, Thickness (Max)="0.060\" (1.52mm)"
C12: library part CL21A226KQQNNNE, "CAP CER 22UF 6.3V X5R 0805", Device Package="0805 (2012 Metric)", manufacturer="Samsung Electro-Mechanics", Operating Temperature="-55°C ~ 85°C", Supplier Part Number 1=1276-2907-1-ND, Temperature Coefficient=X5R, Tolerance=±10%, Voltage - Rated=6.3V, Applications="General Purpose", Capacitance="22 µF", componentlink1description=Datasheet, componentlink1url=http://www.samsungsem.com/kr/support/product-search/mlcc/CL21A226KQQNNNE.jsp, componentlink2description="DigiKey Link", componentlink2url=https://www.digikey.com/en/products/detail/samsung-electro-mechanics/CL21A226KQQNNNE/3888565, lastupdated="2/9/2024 8:16:07 PM", Lifecycle Status=Active, Minimum Order=1, Mounting Type="Surface Mount, MLCC", Package / Case="0805 (2012 Metric)", packaging=TapeAndReel, Part Number=CL21A226KQQNNNE, Part Status=Active, partid=3051, price=0.03, series=CL, Size / Dimension="0.079\" L x 0.049\" W (2.00mm x 1.25mm)", Supplier 1=DigiKey, Thickness (Max)="0.055\" (1.40mm)"
C?: library part EEE-0GA470SR, "CAP ALUM 47UF 20% 4V SMD", Device Package="Radial, Can - SMD", Lifetime @ Temp.="1000 Hrs @ 85°C", manufacturer="Panasonic Electronic Components", Operating Temperature="-40°C ~ 85°C", Ratings=AEC-Q200, Ripple Current @ High Frequency="57.8 mA @ 10 kHz", Ripple Current @ Low Frequency="34 mA @ 120 Hz", Supplier Part Number 1=PCE3850CT-ND, Tolerance=±20%, Voltage - Rated="4 V", Applications=Automotive, Capacitance="47 µF", componentlink1description=Datasheet, componentlink1url=//media.digikey.com/pdf/Data%20Sheets/Panasonic%20Electronic%20Components/S_Series,Type_V_Rev2018.pdf, componentlink2description="DigiKey Link", componentlink2url=https://www.digikey.com/en/products/detail/panasonic-electronic-components/EEE-0GA470SR/766018, Height - Seated (Max)="0.213\" (5.40mm)", lastupdated="6/3/2024 7:52:56 PM", Lifecycle Status=Active, Minimum Order=1, Mounting Type="Surface Mount", Package / Case="Radial, Can - SMD", packaging=TapeAndReel, Part Number=EEE-0GA470SR, Part Status=Active, partid=7144, Polarization=Polar, price=0.09, series=S, Size / Dimension="0.157\" Dia (4.00mm)", Supplier 1=DigiKey, Surface Mount Land Size="0.169\" L x 0.169\" W (4.30mm x 4.30mm)"
D1 D2 D3 D4 D5: library part 150080BS75000, "LED BLUE CLEAR 0805 SMD", Current - Test=20mA, Device Package="0805 (2012 Metric)", Lens Color=Colorless, manufacturer="Würth Elektronik", Millicandela Rating=145mcd, Supplier Device Package=0805, Supplier Part Number 1=732-4982-1-ND, Voltage - Forward (Vf) (Typ)=3.2V, Color=Blue, componentlink1description=Datasheet, componentlink1url=https://katalog.we-online.de/led/datasheet/150080BS75000.pdf, componentlink2description="DigiKey Link", componentlink2url=https://www.digikey.com/en/products/detail/würth-elektronik/150080BS75000/4489912, Configuration=Standard, Height (Max)=0.80mm, lastupdated="6/3/2024 7:58:01 PM", Lens Size="1.40mm x 1.25mm", Lens Style="Rectangle with Flat Top", Lens Transparency=Clear, Lifecycle Status=Active, Minimum Order=1, Mounting Type="Surface Mount", Package / Case="0805 (2012 Metric)", packaging=TapeAndReel, Part Number=150080BS75000, Part Status=Active, partid=779, price=0.13, series=WL-SMCW, Size / Dimension="2.00mm L x 1.25mm W", Supplier 1=DigiKey, Viewing Angle=140°, Wavelength - Dominant=470nm, Wavelength - Peak=465nm
J1 J5: "CONN HEADER VERT 2POS 2.5MM", Current Rating (Amps)=3A, Insulation Color=Natural, manufacturer="JST Sales America Inc.", Material Flammability Rating="UL94 V-0", Operating Temperature="-25°C ~ 85°C", Supplier Part Number 1=455-2247-ND, Voltage Rating=250V, componentlink1description=Datasheet, componentlink1url=http://www.jst-mfg.com/product/pdf/eng/eXH.pdf, componentlink2description="DigiKey Link", componentlink2url=http://digikey.com/product-detail/en/jst-sales-america-inc/B2B-XH-A-LF-SN/455-2247-ND/1651045, Connector Type=Header, Contact Finish - Mating=Tin, Contact Finish - Post=Tin, Contact Length - Post="0.134\" (3.40mm)", Contact Material=Brass, Contact Shape=Square, Contact Type="Male Pin", Fastening Type="Detent Lock", Insulation Height="0.276\" (7.00mm)", Insulation Material="Polyamide (PA66), Nylon 6/6", lastupdated="1/12/2020 11:46:08 PM", Lifecycle Status=Active, Minimum Order=1, Mounting Type="Through Hole", Number of Positions=2, Number of Positions Loaded=All, Number of Rows=1, packaging=Bulk, Part Number=B2B-XH-A(LF)(SN), Part Status=Active, partid=67, Pitch - Mating="0.098\" (2.50mm)", price=0.15, series=XH, Shrouding="Shrouded - 4 Wall", Style="Board to Cable/Wire", Supplier 1=DigiKey, Termination="Press-Fit, Solder"
J3: "CONN HEADER VERT 4POS 2.5MM", Current Rating (Amps)=3A, Insulation Color=Natural, manufacturer="JST Sales America Inc.", Material Flammability Rating="UL94 V-0", Operating Temperature="-25°C ~ 85°C", Supplier Part Number 1=455-2249-ND, Voltage Rating=250V, componentlink1description=Datasheet, componentlink1url=http://www.jst-mfg.com/product/pdf/eng/eXH.pdf, componentlink2description="DigiKey Link", componentlink2url=http://digikey.com/product-detail/en/jst-sales-america-inc/B4B-XH-A-LF-SN/455-2249-ND/1651047, Connector Type=Header, Contact Finish - Mating=Tin, Contact Finish - Post=Tin, Contact Length - Post="0.134\" (3.40mm)", Contact Material=Brass, Contact Shape=Square, Contact Type="Male Pin", Fastening Type="Detent Lock", Insulation Height="0.276\" (7.00mm)", Insulation Material="Polyamide (PA66), Nylon 6/6", lastupdated="1/12/2020 11:46:34 PM", Lifecycle Status=Active, Minimum Order=1, Mounting Type="Through Hole", Number of Positions=4, Number of Positions Loaded=All, Number of Rows=1, packaging=Bulk, Part Number=B4B-XH-A(LF)(SN), Part Status=Active, partid=69, Pitch - Mating="0.098\" (2.50mm)", price=0.21, series=XH, Shrouding="Shrouded - 4 Wall", Style="Board to Cable/Wire", Supplier 1=DigiKey, Termination="Press-Fit, Solder"
J4: "CONN RCPT USB2.0 MICRO B SMD R/A", Current Rating (Amps)="1.8A per Contact", manufacturer="Amphenol ICC (FCI)", Operating Temperature="-30°C ~ 80°C", Supplier Part Number 1=609-4616-2-ND, Voltage - Rated=100VAC, componentlink1description=Datasheet, componentlink1url=https://cdn.amphenol-icc.com/media/wysiwyg/files/documentation/datasheet/inputoutput/io_usb_micro.pdf, componentlink2description="DigiKey Link", componentlink2url=//digikey.com/product-detail/en/amphenol-icc-fci/10118193-0001LF/609-4616-2-ND/2785388, Connector Type="USB - micro B", Features="Solder Retention", Gender=Receptacle, lastupdated="12/9/2019 8:51:28 PM", Lifecycle Status=0, Mating Cycles=10000, Minimum Order=1, Mounting Feature=Horizontal, Mounting Type="Surface Mount, Right Angle; Through Hole", Number of Contacts=5, Number of Ports=1, packaging=TapeAndReel, Part Number=10118193-0001LF, Part Status=Active, price=0.21, series=-, Shielding=Shielded, Specifications="USB 2.0", Supplier 1=DigiKey, Termination=Solder
J6: "CONN HEADER VERT 3POS 2.5MM", Current Rating (Amps)=3A, Insulation Color=Natural, manufacturer="JST Sales America Inc.", Material Flammability Rating="UL94 V-0", Operating Temperature="-25°C ~ 85°C", Supplier Part Number 1=455-2248-ND, Voltage Rating=250V, componentlink1description=Datasheet, componentlink1url=http://www.jst-mfg.com/product/pdf/eng/eXH.pdf, componentlink2description="DigiKey Link", componentlink2url=http://digikey.com/product-detail/en/jst-sales-america-inc/B3B-XH-A-LF-SN/455-2248-ND/1651046, Connector Type=Header, Contact Finish - Mating=Tin, Contact Finish - Post=Tin, Contact Length - Post="0.134\" (3.40mm)", Contact Material=Brass, Contact Shape=Square, Contact Type="Male Pin", Fastening Type="Detent Lock", Insulation Height="0.276\" (7.00mm)", Insulation Material="Polyamide (PA66), Nylon 6/6", lastupdated="1/12/2020 11:46:22 PM", Lifecycle Status=Active, Minimum Order=1, Mounting Type="Through Hole", Number of Positions=3, Number of Positions Loaded=All, Number of Rows=1, packaging=Bulk, Part Number=B3B-XH-A(LF)(SN), Part Status=Active, partid=68, Pitch - Mating="0.098\" (2.50mm)", price=0.19, series=XH, Shrouding="Shrouded - 4 Wall", Style="Board to Cable/Wire", Supplier 1=DigiKey, Termination="Press-Fit, Solder"
L1: library part MAMK2520T1R0M, "FIXED IND 1UH 2.7A 59 MOHM SMD", Current - Saturation=3.1A, Current Rating (Amps)="2.7 A", DC Resistance (DCR)="59mOhm Max", Device Package="1008 (2520 Metric)", Inductance Frequency - Test="2 MHz", manufacturer="Taiyo Yuden", Operating Temperature="-40°C ~ 105°C", Supplier Part Number 1=587-3225-1-ND, Tolerance=±20%, componentlink1description=Datasheet, componentlink1url="https://ds.yuden.co.jp/TYCOMPAS/ut/detail?pn=MAMK2520T1R0M  &u=M", componentlink2description="DigiKey Link", componentlink2url=https://www.digikey.com/en/products/detail/taiyo-yuden/MAMK2520T1R0M/3479448, Height - Seated (Max)="0.047\" (1.20mm)", Inductance="1 µH", lastupdated="6/3/2024 8:02:39 PM", Lifecycle Status=Active, Material - Core=Metal, Minimum Order=1, Mounting Type="Surface Mount", Package / Case="1008 (2520 Metric)", packaging=TapeAndReel, Part Number=MAMK2520T1R0M, Part Status=Active, partid=70, price=0.07, series="MCOIL™, MA", Shielding=Shielded, Size / Dimension="0.098\" L x 0.079\" W (2.50mm x 2.00mm)", Supplier 1=DigiKey, Supplier Device Package="1008 (2520 Metric)", Type="Drum Core, Wirewound"
Q1 Q2: "Transistor BJT NPN", Manufacturer_Name="Comchip Technology", Mouser Part Number=750-SS8050-G, Arrow Part Number=SS8050-G, Arrow Price/Stock=https://www.arrow.com/en/products/ss8050-g/comchip-technology?region=nac, Datasheet Link=https://datasheet.datasheetarchive.com/originals/distributors/DKDS-12/229454.pdf, Height=1.15mm, Manufacturer_Part_Number=SS8050-G, Mouser Price/Stock=https://www.mouser.co.uk/ProductDetail/Comchip-Technology/SS8050-G?qs=LLUE9lz1YbcHg%252BWLMAtcrQ%3D%3D
R1 R4 R7 R10 R15: library part CRCW080510K0FKEA, "RES SMD 10K OHM 1% 1/8W 0805", Device Package="0805 (2012 Metric)", manufacturer="Vishay Dale", Operating Temperature="-55°C ~ 155°C", Power (Watts)="0.125W, 1/8W", Ratings=AEC-Q200, Supplier Device Package=0805, Supplier Part Number 1=541-10.0KCCT-ND, Temperature Coefficient=±100ppm/°C, Tolerance=±1%, componentlink1description=Datasheet, componentlink1url=http://www.vishay.com/docs/20035/dcrcwe3.pdf, componentlink2description="DigiKey Link", componentlink2url=https://www.digikey.com/en/products/detail/vishay-dale/CRCW080510K0FKEA/1175751, Composition="Thick Film", Features="Automotive AEC-Q200", Height - Seated (Max)="0.020\" (0.50mm)", lastupdated="2/8/2024 9:02:37 PM", Lifecycle Status=Active, Minimum Order=1, Number of Terminations=2, Package / Case="0805 (2012 Metric)", packaging=TapeAndReel, Part Number=CRCW080510K0FKEA, Part Status=Active, partid=28101, price=0.01, Resistance="10 kOhms", series=CRCW, Size / Dimension="0.079\" L x 0.049\" W (2.00mm x 1.25mm)", Supplier 1=DigiKey
R2: library part RNCP0805FTD22K1, "RES 22.1K OHM 1% 1/4W 0805", Device Package="0805 (2012 Metric)", manufacturer="Stackpole Electronics Inc", Operating Temperature="-55°C ~ 155°C", Power (Watts)="0.25W, 1/4W", Supplier Device Package=0805, Supplier Part Number 1=RNCP0805FTD22K1CT-ND, Temperature Coefficient=±100ppm/°C, Tolerance=±1%, componentlink1description=Datasheet, componentlink1url=https://www.seielect.com/catalog/sei-rncp.pdf, componentlink2description="DigiKey Link", componentlink2url=https://www.digikey.com/en/products/detail/stackpole-electronics-inc/RNCP0805FTD22K1/2240273, Composition="Thin Film", Features=Anti-Sulfur, Height - Seated (Max)="0.025\" (0.65mm)", lastupdated="2/8/2024 9:02:19 PM", Lifecycle Status=Active, Minimum Order=1, Number of Terminations=2, Package / Case="0805 (2012 Metric)", packaging=TapeAndReel, Part Number=RNCP0805FTD22K1, Part Status=Active, partid=32247, price=0.01, Resistance="22.1 kOhms", series=RNCP, Size / Dimension="0.079\" L x 0.049\" W (2.00mm x 1.25mm)", Supplier 1=DigiKey
R3: library part RNCP0805FTD47K5, "RES 47.5K OHM 1% 1/4W 0805", Device Package="0805 (2012 Metric)", manufacturer="Stackpole Electronics Inc", Operating Temperature="-55°C ~ 155°C", Power (Watts)="0.25W, 1/4W", Supplier Device Package=0805, Supplier Part Number 1=RNCP0805FTD47K5CT-ND, Temperature Coefficient=±100ppm/°C, Tolerance=±1%, componentlink1description=Datasheet, componentlink1url=https://www.seielect.com/catalog/sei-rncp.pdf, componentlink2description="DigiKey Link", componentlink2url=https://www.digikey.com/en/products/detail/stackpole-electronics-inc/RNCP0805FTD47K5/2240284, Composition="Thin Film", Features=Anti-Sulfur, Height - Seated (Max)="0.025\" (0.65mm)", lastupdated="2/8/2024 9:02:31 PM", Lifecycle Status=Active, Minimum Order=1, Number of Terminations=2, Package / Case="0805 (2012 Metric)", packaging=TapeAndReel, Part Number=RNCP0805FTD47K5, Part Status=Active, partid=29610, price=0.01, Resistance="47.5 kOhms", series=RNCP, Size / Dimension="0.079\" L x 0.049\" W (2.00mm x 1.25mm)", Supplier 1=DigiKey
R5 R6 R11 R14 R17: library part CRG0805F270R, "RES SMD 270 OHM 1% 1/8W 0805", Device Package="0805 (2012 Metric)", manufacturer="TE Connectivity Passive Product", Operating Temperature="-55°C ~ 155°C", Power (Watts)="0.125W, 1/8W", Supplier Device Package=0805, Supplier Part Number 1=A126355CT-ND, Temperature Coefficient=±100ppm/°C, Tolerance=±1%, componentlink1description=Datasheet, componentlink1url=https://www.te.com/commerce/DocumentDelivery/DDEController?Action=srchrtrv&DocNm=1773204&DocType=DS&DocLang=English, componentlink2description="DigiKey Link", componentlink2url=https://www.digikey.com/en/products/detail/te-connectivity-passive-product/CRG0805F270R/2380878, Composition="Thick Film", Height - Seated (Max)="0.026\" (0.65mm)", lastupdated="2/8/2024 9:02:34 PM", Lifecycle Status=Active, Minimum Order=1, Number of Terminations=2, Package / Case="0805 (2012 Metric)", packaging=TapeAndReel, Part Number=CRG0805F270R, Part Status=Active, partid=28942, price=0.01, Resistance="270 Ohms", series="CRG, Neohm", Size / Dimension="0.079\" L x 0.049\" W (2.00mm x 1.25mm)", Supplier 1=DigiKey
R8 R9: library part RC0603JR-130RP, "RES 0 OHM 5% - 0603", Device Package="0603 (1608 Metric)", manufacturer=Yageo, Operating Temperature="-55°C ~ 155°C", Ratings="7C1 RoHS w/out Exemption (100% Pb-Free)", Supplier Device Package=0603, Supplier Part Number 1=13-RC0603JR-130RPCT-ND, Tolerance=±5%, componentlink1description=Datasheet, componentlink1url=https://www.yageo.com/upload/media/product/productsearch/datasheet/rchip/PYu-RC_51_RoHS_P_5.pdf, componentlink2description="DigiKey Link", componentlink2url=https://www.digikey.com/en/products/detail/yageo/RC0603JR-130RP/17016099, Composition="Thick Film", Height - Seated (Max)="0.022\" (0.55mm)", lastupdated="7/25/2024 9:19:00 AM", Lifecycle Status=Active, Minimum Order=1, Number of Terminations=2, Package / Case="0603 (1608 Metric)", packaging=CutTape, Part Number=RC0603JR-130RP, partid=87269, price=0.01, Resistance="0 Ohms", series=RC_P, Size / Dimension="0.063\" L x 0.031\" W (1.60mm x 0.80mm)", Supplier 1=DigiKey
R13: library part ERA-6AEB105V, "RES 1M OHM 0.1% 1/8W 0805", Device Package="0805 (2012 Metric)", manufacturer="Panasonic Electronic Components", Operating Temperature="-55°C ~ 155°C", Power (Watts)="0.125W, 1/8W", Ratings=AEC-Q200, Supplier Device Package=0805, Supplier Part Number 1=P1MDACT-ND, Temperature Coefficient=±25ppm/°C, Tolerance=±0.1%, componentlink1description=Datasheet, componentlink1url=https://industrial.panasonic.com/cdbs/www-data/pdf/RDM0000/AOA0000C307.pdf, componentlink2description="DigiKey Link", componentlink2url=https://www.digikey.com/en/products/detail/panasonic-electronic-components/ERA-6AEB105V/1465821, Composition="Thin Film", Features="Automotive AEC-Q200", Height - Seated (Max)="0.024\" (0.60mm)", lastupdated="7/13/2023 7:38:53 PM", Lifecycle Status=Active, Minimum Order=1, Number of Terminations=2, Package / Case="0805 (2012 Metric)", packaging=TapeAndReel, Part Number=ERA-6AEB105V, Part Status=Active, partid=28069, price=0.03, Resistance="1 MOhms", series=ERA-6A, Size / Dimension="0.079\" L x 0.049\" W (2.00mm x 1.25mm)", Supplier 1=DigiKey
R?: library part ERA-6AEB4221V, "RES SMD 4.22K OHM 0.1% 1/8W 0805", Device Package="0805 (2012 Metric)", manufacturer="Panasonic Electronic Components", Operating Temperature="-55°C ~ 155°C", Power (Watts)="0.125W, 1/8W", Ratings=AEC-Q200, Supplier Device Package=0805, Supplier Part Number 1=P4.22KDACT-ND, Temperature Coefficient=±25ppm/°C, Tolerance=±0.1%, componentlink1description=Datasheet, componentlink1url=https://industrial.panasonic.com/cdbs/www-data/pdf/RDM0000/AOA0000C307.pdf, componentlink2description="DigiKey Link", componentlink2url=https://www.digikey.com/en/products/detail/panasonic-electronic-components/ERA-6AEB4221V/2025719, Composition="Thin Film", Features="Automotive AEC-Q200", Height - Seated (Max)="0.024\" (0.60mm)", lastupdated="2/8/2024 9:02:36 PM", Lifecycle Status=Active, Minimum Order=1, Number of Terminations=2, Package / Case="0805 (2012 Metric)", packaging=TapeAndReel, Part Number=ERA-6AEB4221V, Part Status=Active, partid=28375, price=0.03, Resistance="4.22 kOhms", series=ERA-6A, Size / Dimension="0.079\" L x 0.049\" W (2.00mm x 1.25mm)", Supplier 1=DigiKey
SW1 SW2: "Integrated Circuit", Manufacturer_Name="CUI Devices", Mouser Part Number=179-TS046643BK160SMT, Arrow Part Number=TS04-66-43-BK-160-SMT, Arrow Price/Stock=https://www.arrow.com/en/products/ts04-66-43-bk-160-smt/cui-devices?region=nac, Datasheet Link=https://www.cuidevices.com/product/resource/ts04.pdf, Height=4.5mm, Manufacturer_Part_Number=TS04-66-43-BK-160-SMT, Mouser Price/Stock=https://www.mouser.co.uk/ProductDetail/CUI-Devices/TS04-66-43-BK-160-SMT?qs=A6eO%252BMLsxmRO%252BN2ogoDtCQ%3D%3D
U1: "Integrated Circuit", Manufacturer_Name=STMicroelectronics, Mouser Part Number=511-USB6B1RL, Arrow Part Number=USB6B1RL, Arrow Price/Stock=https://www.arrow.com/en/products/usb6b1rl/stmicroelectronics?region=nac, Datasheet Link=https://www.mouser.com/datasheet/2/389/usb6b1-1852617.pdf, Height=1.75mm, Manufacturer_Part_Number=USB6B1RL, Mouser Price/Stock=https://www.mouser.co.uk/ProductDetail/STMicroelectronics/USB6B1RL?qs=Ctxo64yJVFuZb8Hhk%2F3CCQ%3D%3D
U2: "Integrated Circuit", Manufacturer_Name="Espressif Systems", Mouser Part Number=356-ESP32WRM32E164PH, Datasheet Link=https://www.google.com/url?sa=t&rct=j&q=&esrc=s&source=web&cd=&ved=2ahUKEwjLw4ysybv2AhXFzIUKHZUbB64QFnoECCwQAQ&url=https%3A%2F%2Fwww.espressif.com%2Fsites%2Fdefault%2Ffiles%2Fdocumentation%2Fesp32-wroom-32e_esp32-wroom-32ue_datasheet_en.pdf&usg=AOvVaw1xSL, Height=3.25mm, Manufacturer_Part_Number=ESP32-WROOM-32E-N8, Mouser Price/Stock=https://www.mouser.co.uk/ProductDetail/Espressif-Systems/ESP32-WROOM-32E-N8?qs=Li%252BoUPsLEnsLnZW%252BGLgUhw%3D%3D
U3: "Integrated Circuit", Manufacturer_Name="Silicon Labs", Mouser Part Number=634-CP2102NA02QFN24R, Arrow Part Number=CP2102N-A02-GQFN24R, Arrow Price/Stock=https://www.arrow.com/en/products/cp2102n-a02-gqfn24r/silicon-labs?region=asia, Datasheet Link=https://www.silabs.com/documents/public/data-sheets/cp2102n-datasheet.pdf, Height=0.8mm, Manufacturer_Part_Number=CP2102N-A02-GQFN24R, Mouser Price/Stock=https://www.mouser.co.uk/ProductDetail/Silicon-Labs/CP2102N-A02-GQFN24R?qs=u16ybLDytRaIVBf0X4zL0g%3D%3D
U4 U5: "LED", Manufacturer_Name=SparkFun, Mouser Part Number=474-COM-13667, Arrow Part Number=COM-13667, Arrow Price/Stock=https://www.arrow.com/en/products/com-13667/sparkfun-electronics?region=nac, Datasheet Link=https://cdn.sparkfun.com/datasheets/BreakoutBoards/WS2812B.pdf, Height=2mm, Manufacturer_Part_Number=COM-13667, Mouser Price/Stock=https://www.mouser.co.uk/ProductDetail/SparkFun/COM-13667?qs=WyAARYrbSnYuV74MbwnFXg%3D%3D
U6: "IC CONTROLLR LI-ION 4.2V SOT23-5", Battery Pack Voltage=4.2V, Charge Current - Max=500mA, Current - Charging="Constant - Programmable", Device Package="SC-74A, SOT-753", manufacturer="Microchip Technology", Operating Temperature="-40°C ~ 85°C (TA)", Supplier Device Package=SOT-23-5, Supplier Part Number 1=MCP73831T-2ATI/OTTR-ND, Voltage - Supply (Max)=6V, Battery Chemistry="Lithium Ion/Polymer", componentlink1description=Datasheet, componentlink1url=http://ww1.microchip.com/downloads/en/DeviceDoc/20001984g.pdf, componentlink2description="DigiKey Link", componentlink2url=//digikey.com/product-detail/en/microchip-technology/MCP73831T-2ATI-OT/MCP73831T-2ATI-OTTR-ND/964303, Fault Protection="Over Voltage", lastupdated="12/3/2019 11:33:03 PM", Lifecycle Status=0, Minimum Order=1, Mounting Type="Surface Mount", Number of Cells=1, Package / Case="SC-74A, SOT-753", packaging=TapeAndReel, Part Number=MCP73831T-2ATI/OT, Part Status=Active, partid=1, price=0.42, Programmable Features=Current, series=-, Supplier 1=DigiKey
U7: "Integrated Circuit", Manufacturer_Name=Microchip, Mouser Part Number=998-MIC2876-50YMTTR, Arrow Part Number=MIC2876-5.0YMT-TR, Arrow Price/Stock=https://www.arrow.com/en/products/mic2876-5.0ymt-tr/microchip-technology?region=nac, Datasheet Link=https://componentsearchengine.com/Datasheets/1/MIC2876-5.0YMT-TR.pdf, Height=0.6mm, Manufacturer_Part_Number=MIC2876-5.0YMT-TR, Mouser Price/Stock=https://www.mouser.co.uk/ProductDetail/Microchip-Technology/MIC2876-5.0YMT-TR?qs=Y3Q3JoKAO1ROB46ffRMt%252BQ%3D%3D
U8: "3V to 17V input voltage, 3.3V, 1A output synchronous buck module in QFN package", Package="PowerFQFN-7 Texas Instruments", Check_prices=https://www.snapeda.com/parts/TPSM861253RDXR/Texas+Instruments/view-part/?ref=eda, MF="Texas Instruments", MP=TPSM861253RDXR, SnapEDA_Link=https://www.snapeda.com/parts/TPSM861253RDXR/Texas+Instruments/view-part/?ref=snap
U9: "Integrated Circuit", Manufacturer_Name="Texas Instruments", Mouser Part Number=595-DRV8210PDSGR, Arrow Part Number=DRV8210PDSGR, Arrow Price/Stock=https://www.arrow.com/en/products/drv8210pdsgr/texas-instruments?region=nac, Datasheet Link=https://www.ti.com/lit/gpn/drv8210p, Height=0.8mm, Manufacturer_Part_Number=DRV8210PDSGR, Mouser Price/Stock=https://www.mouser.co.uk/ProductDetail/Texas-Instruments/DRV8210PDSGR?qs=eP2BKZSCXI76Q1gdVPvR3A%3D%3D

## Via types
v1: diameter 20, hole 10, Top Layer to Bottom Layer, 4 vias

## Nets (pads, with @x,y where several pads share a name; then routed paths per layer and width w, separated by ;. In a path a pad name is that pad's centre, name@x,y a point inside that pad or via, vN(x,y) a via of type N, cw(c..) or ccw(c..) an arc to the next point about the centre after c; other vN are vias at no path point)
3V3: C1.1 C2.2 C3.2 C4.2 C14.2 C15.1 J3.2 R5.2 R6.2 R7.1 R10.2 R17.1 U2.2 U3.5 U3.6 U3.7 U8.3 U8.7 U9.7 U9.8 | length 42.6
  Bottom Layer w6: v1(1331.46,791.34) C15.1
BOOT: Q2.3 SW1.3 SW1.4 U2.25
CHARGE-STATUS: D3.2 U6.1
DTR: Q2.2 R1.1 U3.23 | length 459.8
  Top Layer w6: U3.23 1088.16,1767.72 1219.65,1767.72 R1.1@1254.02,1733.35 ; R1.1 R1.1@1254.02,1733.35 ; Q2.2 1321.93,1801.26 R1.1@1254.02,1733.35
EN: C6.2 C7.1 Q1.3 R10.1 SW2.3 SW2.4 U2.3 | length 447.9
  Top Layer w10: Q1.3 1295.44,1493.19 1300.44,1488.19 v1(1303.15,1488.19)
  Bottom Layer w10: C6.2 C7.1 R10.1 ; v1(1303.15,1488.19) 1303.15,1230.71 U2.3
GND: C1.2 C2.1 C3.1 C4.1 C5.1 C6.1 C7.2 C8.2 C9.2 C10.1 C11.1 C12.1 C13.1 C14.1 C15.2 C?.1@1791.33,661.42 C?.2@2143.7,602.36 D4.2 D5.2 J1.1 J3.1 J4.5 J4.S J6.1 R3.1 R?.1 SW1.1 SW1.2 SW2.1 SW2.2 U1.4 U1.5 U2.1 U2.38 U2.39 U2.40 U2.41 U2.42 U2.43 U2.44 U2.45 U2.46 U2.47 U3.2 U3.25 U4.3 U5.3 U6.2 U7.2 U7.4 U7.9 U8.4 U9.4 U9.9 | length 81
  Top Layer w10: U7.4 822.83,948.82 C10.1
I2C-SCK: J3.4 U2.13 | length 510
  Bottom Layer w10: U2.13 805.51,1110.57 1023.62,892.46 1023.62,874.02 J3.4
I2C-SDA: J3.3 U2.12 | length 609.5
  Bottom Layer w10: U2.12 855.51,1090.25 1039.53,906.24 1039.53,776.73 992.2,729.41 J3.3
IR-EMIT: U2.11 | length 778.5
  Bottom Layer w10: U2.11 905.51,1059.34 1055.12,909.74 1055.12,751.97 1176.1,630.98 1245.16,630.98
IR-RECV: U2.10 | length 623.8
  Bottom Layer w10: U2.10 955.51,1037.62 1068.62,924.51 1068.62,897.64 1236.85,729.41 1245.16,729.41
LEDD: U2.37 U4.4 | length 274.4
  Bottom Layer w6: U2.37 1355.51,2046.46 1449.88,2140.83 U4.4
MOTOR-1: U2.6 U9.6 | length 645.1
  Bottom Layer w6: U2.6 1155.51,1135.83 1196.85,1094.49 1196.85,1012.46 1305.24,904.07 1305.24,785.02 1322.83,767.43 1322.83,708.66 1334.65,696.85 U9.6
MOTOR-1-OUT: J5.2 U9.2 | length 84.4
  Bottom Layer w10: U9.2 1457.6,717.44 1484.62,717.44 1517.72,750.54 J5.2
MOTOR-2: U2.7 U9.5 | length 721.1
  Bottom Layer w6: U2.7 1105.51,1172.39 1185.04,1092.86 1185.04,1027.67 1186.07,1026.64 1186.07,929.19 1185.04,928.16 1185.04,830.71 1185.07,809.06 1219.4,774.73 1278.69,774.73 1311.02,742.4 1311.02,700.79 1334.65,677.17 U9.5
MOTOR-2-OUT: J5.1 U9.3 | length 194.2
  Bottom Layer w10: U9.3 1567.91,696.85 1616.14,745.08 J5.1
NetD1_1: D1.1 U3.14 | length 285.2
  Top Layer w6: U3.14 1088.16,1484.25 1188.98,1484.25 1226.38,1446.85 D1.1
NetD1_2: D1.2 R5.1 | length 176.6
  Top Layer w10: R5.1 1197.83,1339.57 1224.41,1366.14 1265.75,1366.14 D1.2
NetD2_1: D2.1 U3.13 | length 146.3
  Top Layer w6: U3.13 1053.15,1491.43 D2.1
NetD2_2: D2.2 R6.1 | length 166.6
  Top Layer w10: R6.1 1063.98,1344.54 1069.83,1350.39 1122.05,1350.39 1135.83,1364.17 D2.2
NetD3_1: D3.1 R11.2
NetD4_1: D4.1 R14.2
NetD5_1: D5.1 R17.2 | length 69.9
  Bottom Layer w15: D5.1 R17.2
NetL1_2: L1.2 U7.1 | length 72.6
  Top Layer w10: L1.2 696.85,935.04 U7.1
NetQ1_1: Q1.1 R1.2 | length 165.2
  Top Layer w6: Q1.1 1293.78,1588.27 1293.78,1696.33 1322.91,1725.47 R1.2
NetQ2_1: Q2.1 R4.2 | length 262.9
  Top Layer w6: R4.2 1322.91,1658.54 1396.73,1732.36 Q2.1
NetR7_2: R7.2 U3.9
NetR13_1: R13.1 U7.7
NetR15_1: R15.1 U8.6
NetR?_2: R?.2 U6.5
NetU4_2: U4.2 U5.4
RTS: Q1.2 R4.1 U3.19 | length 278.7
  Top Layer w6: U3.19 1078.94,1645.47 1093.87,1630.54 1210.31,1630.54 1220.99,1641.22 1240.63,1641.22 R4.1 1254.02,1650.67 1227.44,1624.09 Q1.2
RXD: R9.1 U3.20 | length 69
  Top Layer w6: U3.20 1092.94,1688.98 R9.1
RXD0: R8.2 U2.34 | length 221.4
  Top Layer w6: R8.2 1175.2,1736.22 v1(1208.66,1736.22)
  Bottom Layer w6: U2.34 1208.66,1914.17 v1(1208.66,1736.22)
STEER-PWM: J6.3 U2.14 | length 519.9
  Bottom Layer w10: J6.3 709.72,1170.75 755.51,1216.54 U2.14
TXD: R8.1 U3.21 | length 90.7
  Top Layer w6: U3.21 1089.61,1713.49 1089.61,1727.41 1102.36,1740.16 R8.1
TXD0: R9.2 U2.35 | length 327.6
  Top Layer w6: R9.2 1187.01,1667.32 v1(1200.79,1653.54)
  Bottom Layer w6: v1(1200.79,1653.54) 1255.51,1708.27 U2.35
USB-PROT_N: U1.6 U3.4 | length 258.8
  Top Layer w6: U3.4 926.94,1675.92 902.36,1700.5 902.36,1760.62 990.75,1849.02 1027.09,1849.02
USB-PROT_P: U1.7 U3.3 | length 194.4
  Top Layer w6: U3.3 938.26,1687.23 918.36,1707.13 918.36,1728.93 993.35,1803.92 1022.18,1803.92 1027.09,1799.02
USB_N: J4.2 U1.3 | length 246.5
  Top Layer w15: J4.2 1151.43,2012.65 1151.43,1993.42 1151.28,1993.27 1151.28,1879.99 1194.76,1836.52 1212.69,1836.52 1218.11,1841.93 1218.11,1843.72 1223.41,1849.02 1240.63,1849.02
USB_P: J4.3 U1.2 | length 287.9
  Top Layer w15: J4.3 1126.13,2012.65 1126.13,1993.42 1126.28,1993.27 1126.28,1869.64 1184.4,1811.52 1212.69,1811.52 1218.11,1806.1 1218.11,1804.31 1223.41,1799.02 1240.63,1799.02
V-USB: J4.1 U1.1 | length 167.8
  Top Layer w10: J4.1@1177.17,2011.81 1177.17,1913.39 1188.98,1901.57 1238.07,1901.57 1240.63,1899.02
VBATT: C9.1 C10.2 C11.2 J1.2 L1.1 R13.2 U6.3 U7.3 U7.6
VBOOST: C12.2 C13.2 C?.1@2005.9,602.36 C?.2@1854.33,661.42 J6.2 R14.1 R15.2 U4.1 U5.1 U7.5 U7.8 U8.1 U9.1 | length 72.2
  Top Layer w10: C12.2 649.61,1019.69 U7.8
VBUS: C5.2 R2.2 R3.2 U3.8
VUSB-PROT: C8.1 R2.1 R11.1 U1.8 U6.4 | length 70.1
  Top Layer w15: R2.1 966.14,1899.02 1027.09,1899.02
pads on no net: J4.4 U2.4 U2.5 U2.8 U2.9 U2.15 U2.16 U2.17 U2.18 U2.19 U2.20 U2.21 U2.22 U2.23 U2.24 U2.26 U2.27 U2.28 U2.29 U2.30 U2.31 U2.32 U2.33 U2.36 U3.1 U3.10 U3.11 U3.12 U3.15 U3.16 U3.17 U3.18 U3.22 U3.24 U5.2 U8.2 U8.5 U8.8 U8.9 U8.10 U8.11 U8.12 U8.13 U8.14 U8.15 U8.16 U8.17 U8.18 U8.19

## Polygon pours and split planes (outlines as drawn)
GND on Top Layer "NONET_L01_P000" (solid, remove dead copper, shelved, pour order 0): 598.43,2208.66 598.43,437.01 1700.79,437.01 1700.79,2208.66
GND on Bottom Layer "NONET_L04_P001" (solid, remove dead copper, shelved, pour order 1): 598.43,2208.66 598.43,437.01 1700.79,437.01 1700.79,2208.66
3V3 on Layer 2 "NONET_L03_P002" (solid, remove dead copper, shelved, pour order 2): 598.43,2208.66 598.43,437.01 1700.79,437.01 1700.79,2208.66

## Keep-outs
Keep-Out Layer:
  rectangle: 1437.01,1216.54 1700.79,1925.2

## Silkscreen, mask and mechanical layers (free items; w line width, h text height)
Mechanical 1:
  the board outline again, w10